# Altium PCB DryContact.PcbDoc
Units mil, origin at the board's own origin, x right, y up, seen from the top; angles counter-clockwise.
Board outline 5610.24 x 885.83 mil, 2 copper layers (Top Layer, Bottom Layer); 14 components, 11 nets, 36 pads, 0 vias.
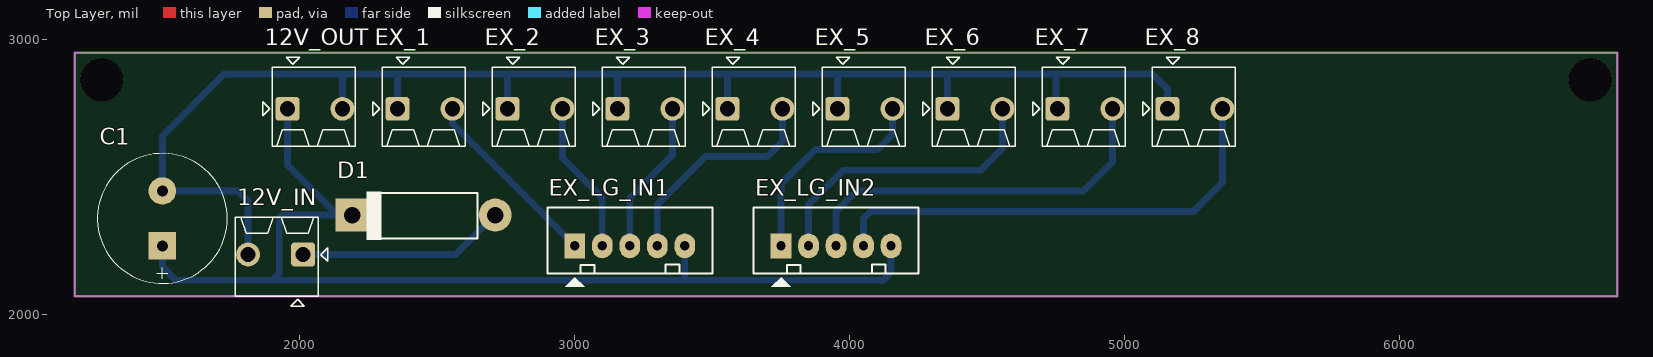
[diagram p0: Top Layer view]
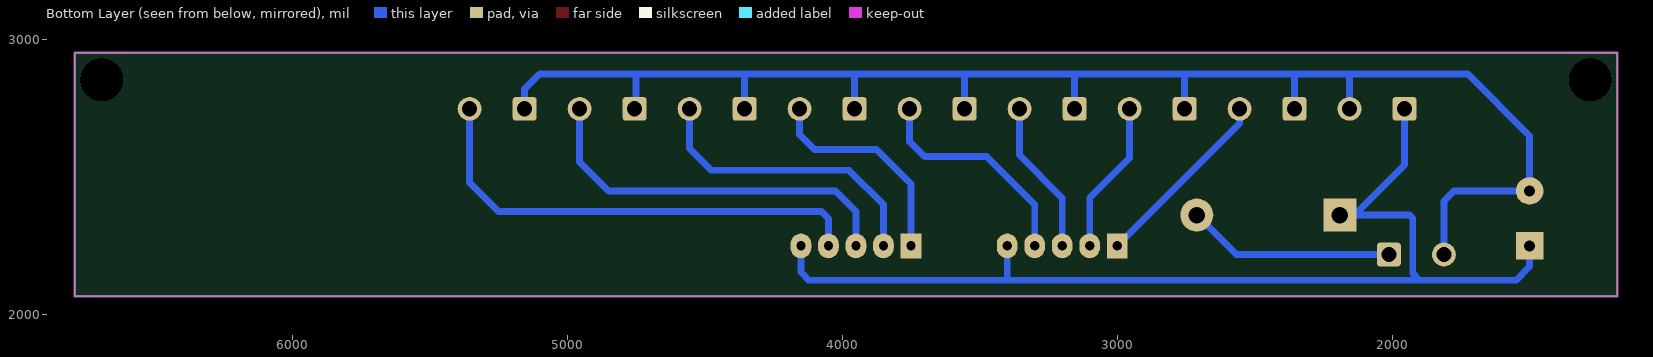
[diagram p1: Bottom Layer view, seen from below]
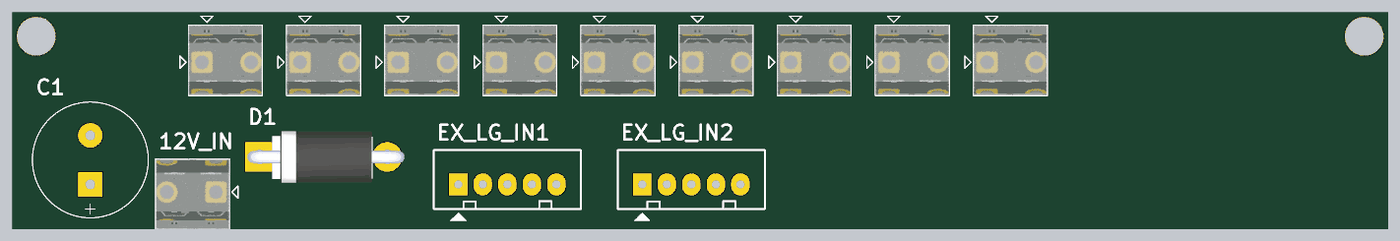
[diagram p2: 3D render of the assembled board from above, using the file's embedded part models]

## Layer stack, top to bottom
Top Solder: solder mask 0.4, Solder Resist, Dk 3.5
Top Layer: signal copper 1.4
Dielectric 1: dielectric 12.6, FR-4, Dk 4.8
Bottom Layer: signal copper 1.4
Bottom Solder: solder mask 0.4, Solder Resist, Dk 3.5

## Board outline
1181.1,2066.93 6791.34,2066.93 6791.34,2952.76 1181.1,2952.76

## Design rules (kind name [scope] priority, off if disabled: settings)
Clearance [All] p1: gap=20
PolygonConnect [All] p1: connectstyle=Relief reliefconductorwidth=10 reliefentries=4 polygonreliefangle="90 Angle" airgapwidth=10
RoutingLayers [All] p1: top layer_v5=FALSE bottom layer_v5=TRUE
RoutingVias [All] p1: holewidth=28 width=50 viastyle="Through Hole" minholewidth=23.62 minwidth=47.24 maxholewidth=196.85 maxwidth=196.85
SolderMaskExpansion [All] p1: expansion=4
Width [All] p1: maxlimit=118.11 minlimit=10 preferedwidth=10
29 further rules are at their usual default settings.

## Components (designator, comment, footprint, x,y, rotation, side; value= is the part's Value field where it differs from the comment)
12V_IN "Stackable ScrewTerm" 2P_PCB_ScrewTerm_200mil 2066.93,2066.93 r90 top
12V_OUT "Stackable ScrewTerm" 2P_PCB_ScrewTerm_200mil 1900,2900 r270 top
C1 "2200uF/35V" CP_1000uF_25V 1500,2350 r90 top
D1 "Diode" "Diode 3A" 2460.63,2362.2 r180 top
EX_1 "Stackable ScrewTerm" 2P_PCB_ScrewTerm_200mil 2300,2900 r270 top
EX_2 "Stackable ScrewTerm" 2P_PCB_ScrewTerm_200mil 2700,2900 r270 top
EX_3 "Stackable ScrewTerm" 2P_PCB_ScrewTerm_200mil 3100,2900 r270 top
EX_4 "Stackable ScrewTerm" 2P_PCB_ScrewTerm_200mil 3500,2900 r270 top
EX_5 "Stackable ScrewTerm" 2P_PCB_ScrewTerm_200mil 3900,2900 r270 top
EX_6 "Stackable ScrewTerm" 2P_PCB_ScrewTerm_200mil 4300,2900 r270 top
EX_7 "Stackable ScrewTerm" 2P_PCB_ScrewTerm_200mil 4700,2900 r270 top
EX_8 "Stackable ScrewTerm" 2P_PCB_ScrewTerm_200mil 5100,2900 r270 top
EX_LG_IN1 "JP5" CON5 3000,2250 r0 top
EX_LG_IN2 "JP5" CON5 3750,2250 r0 top

## Footprints (in the part's own frame and the unit in brackets; to place one, negate y for a bottom-side part, rotate by r counter-clockwise, add the part's x,y. Pads: shape width x height; smd on the part's side, far side on the other; paste and mask are expansions set on the pad)
2P_PCB_ScrewTerm_200mil [mm]
  rrect25% 2.2x2.2 hole 1.4: 1(3.85,1.397)
  round 2.2 hole 1.4: 2(3.85,6.477)
  silkscreen extent -0.93,-0.89 7.3,7.66, body extent 0,0 7.3,7.62, height 8.5
CON5 [mil] "CON5"
  rect 75x90 hole 34: 1(0,0)
  oval 75x90 hole 34: 2(100,0) 3(200,0) 4(300,0) 5(400,0)
  silkscreen extent -100,-150 500,140
CP_1000uF_25V [mil]
  rect 100x100 hole 40: 1(-100,0)
  round 100 hole 40: 2(100,0)
  silkscreen extent -236,-236 236,236, body extent -236,-236 237,236, height 791
"Diode 3A" [mil] "Diode Schottky 1N5822"
  round 120 hole 60: 1(-250,0)
  rect 120x120 hole 60: 2(270,0)
  silkscreen extent -186,-85 219,90, body extent -321,-104 321,104, height 248

## Part data
12V_IN 12V_OUT EX_1 EX_2 EX_3 EX_4 EX_5 EX_6 EX_7 EX_8: library part 2P_ScrewTerm_90S_3.81MM, "Terminal Block Screw Type THT 2-Position 3.81mm pitch"
C1: library part CP4, "Cap 1000uF/16V - 220uF/50V"
EX_LG_IN1 EX_LG_IN2: library part Con5, "Connector 5"

## Free pads (board coordinates)
  round 157.48 hole 157.48: 0(6692.91,2854.33) 3(1279.53,2854.33)

## Nets (pads, with @x,y where several pads share a name; then routed paths per layer and width w, separated by ;. In a path a pad name is that pad's centre, name@x,y a point inside that pad or via, vN(x,y) a via of type N, cw(c..) or ccw(c..) an arc to the next point about the centre after c; other vN are vias at no path point)
+12_EX: 12V_OUT.1 C1.1 D1.2 EX_LG_IN1.5 EX_LG_IN2.5 | length 3946.4
  Bottom Layer w25: C1.1 1500,2175 1550,2125 1900,2125 ; 12V_OUT.1 1955,2545 D1.2@2137.8,2362.2 ; D1.2 D1.2@2137.8,2362.2 ; EX_LG_IN1.5 3400,2125 ; EX_LG_IN2.5 4150,2154.43 4120.57,2125 3400,2125 ; 1900,2125 3400,2125 ; 1900,2125 1925,2150 1925,2350 1937.2,2362.2 D1.2@2137.8,2362.2
EX_GND: 12V_IN.2 12V_OUT.2 C1.2 EX_1.1 EX_2.1 EX_3.1 EX_4.1 EX_5.1 EX_6.1 EX_7.1 EX_8.1 | length 5579.4
  Bottom Layer w25: 12V_IN.2 1811.93,2413.07 1775,2450 C1.2 1500,2650 1725,2875 2150,2875 ; 12V_OUT.2 2155,2870 2150,2875 ; EX_1.1 2355,2870 2350,2875 ; EX_2.1 2755,2870 2750,2875 ; EX_3.1 3155,2870 3150,2875 ; EX_4.1 3555,2870 ; EX_5.1 3955,2870 ; EX_6.1 4355,2870 4350,2875 ; EX_7.1 4750,2753.43 4750,2875 ; EX_8.1 5155,2820 5100,2875 4750,2875 ; 2150,2875 2350,2875 ; 2350,2875 2750,2875 ; 2750,2875 3150,2875 ; 3150,2875 4350,2875 ; 4350,2875 4750,2875
EX_IN_1: EX_1.2 EX_LG_IN1.1 | length 682.8
  Bottom Layer w25: EX_1.2 2555,2695 EX_LG_IN1.1
EX_IN_2: EX_2.2 EX_LG_IN1.2 | length 558.5
  Bottom Layer w25: EX_2.2 2955,2570 3100,2425 EX_LG_IN1.2
EX_IN_3: EX_3.2 EX_LG_IN1.3 | length 562.6
  Bottom Layer w25: EX_LG_IN1.3 3200,2425 3355,2580 EX_3.2
EX_IN_4: EX_4.2 EX_LG_IN1.4 | length 818.7
  Bottom Layer w25: EX_LG_IN1.4 3300,2400 3475,2575 3700,2575 3755,2630 EX_4.2
EX_IN_5: EX_5.2 EX_LG_IN2.1 | length 798
  Bottom Layer w25: EX_LG_IN2.1 3750,2475 3875,2600 4100,2600 4155,2655 EX_5.2
EX_IN_6: EX_6.2 EX_LG_IN2.2 | length 1083.3
  Bottom Layer w25: EX_LG_IN2.2 3850,2400 3975,2525 4475,2525 4555,2605 EX_6.2
EX_IN_7: EX_7.2 EX_LG_IN2.3 | length 1398
  Bottom Layer w25: EX_LG_IN2.3 3950,2375 4025,2450 4850,2450 4955,2555 EX_7.2
EX_IN_8: EX_8.2 EX_LG_IN2.4 | length 1727.3
  Bottom Layer w25: EX_LG_IN2.4 4050,2350 4075,2375 5250,2375 5355,2480 EX_8.2
Net12V_IN_1: 12V_IN.1 D1.1 | length 758.2
  Bottom Layer w25: 12V_IN.1 2566.93,2218.5 D1.1

## Keep-outs
Keep-Out Layer:
  the board outline again, w10